# Altium PCB C500_PHY_IP101GRI_V1.0.0.PcbDoc
Units mil, origin at the board's own origin, x right, y up, seen from the top; angles counter-clockwise.
Board outline 6000 x 4000 mil, 2 copper layers (Top, Bottom), stack 12.7 mil thick; 82 components, 71 nets, 264 pads, 232 vias.
Unrouted connection lines stored in the file: 154.
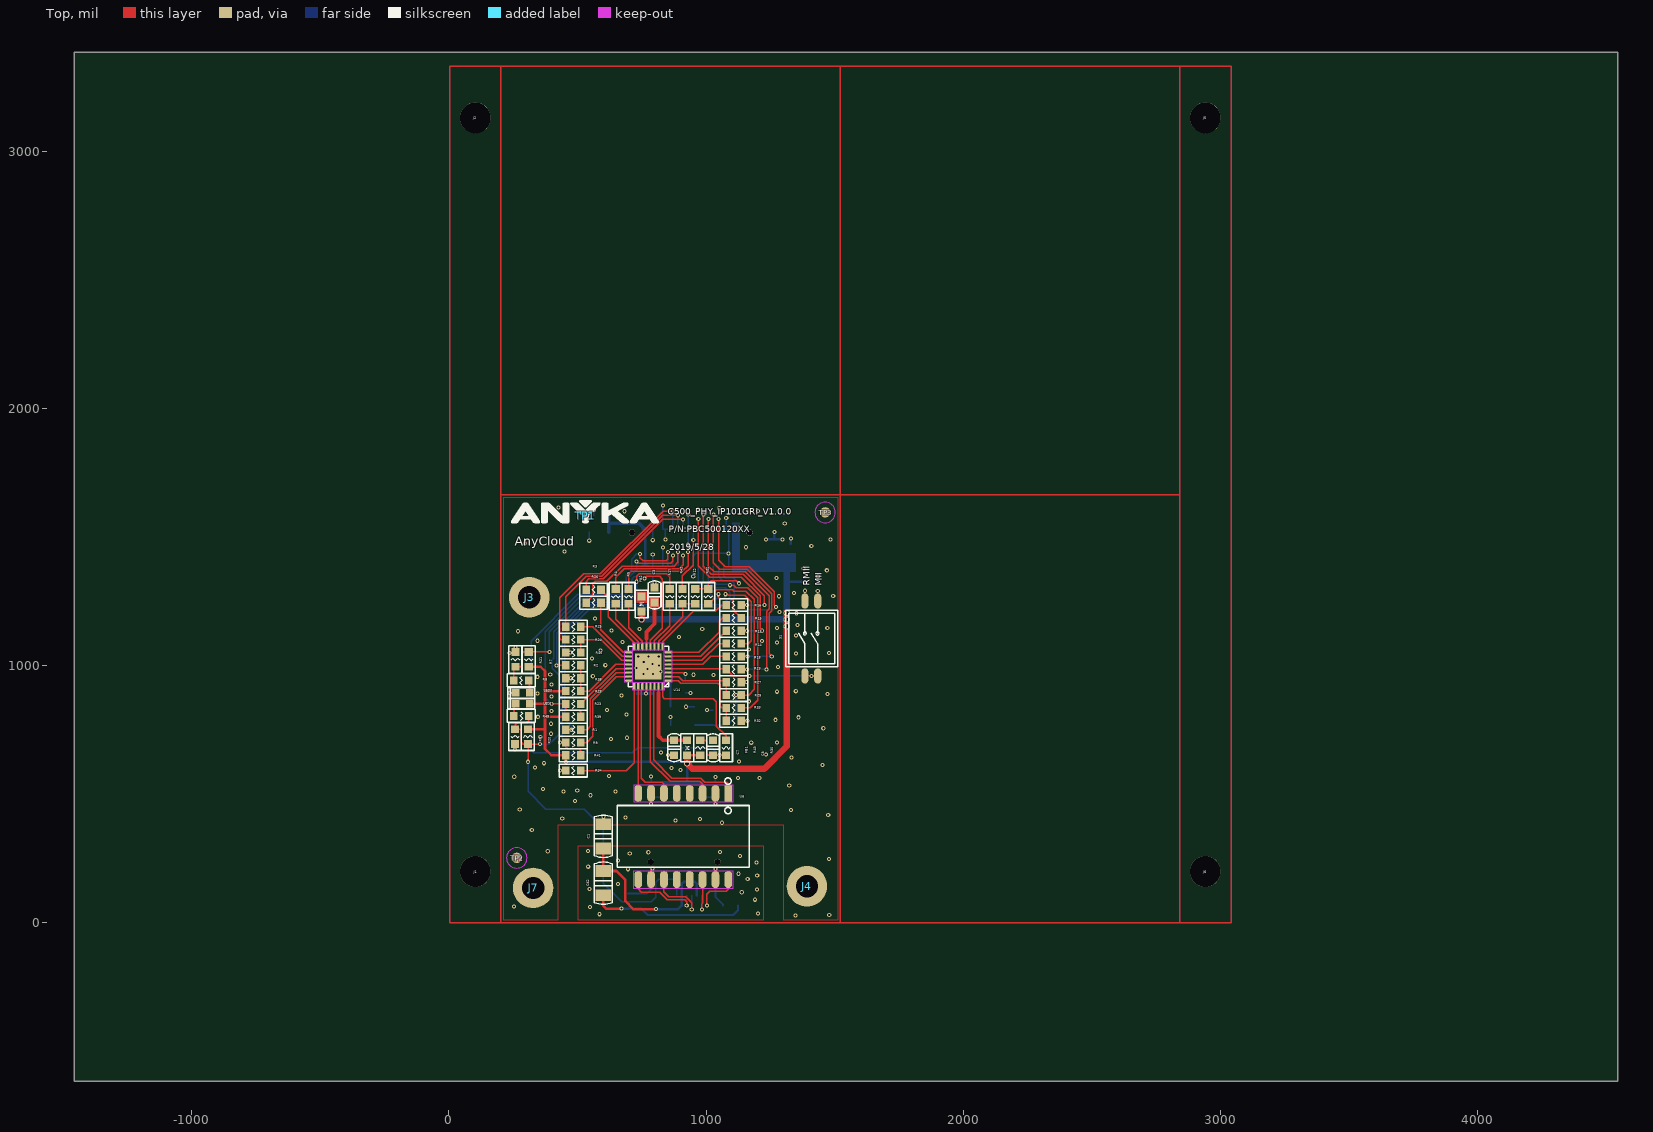
[diagram p0: Top view]
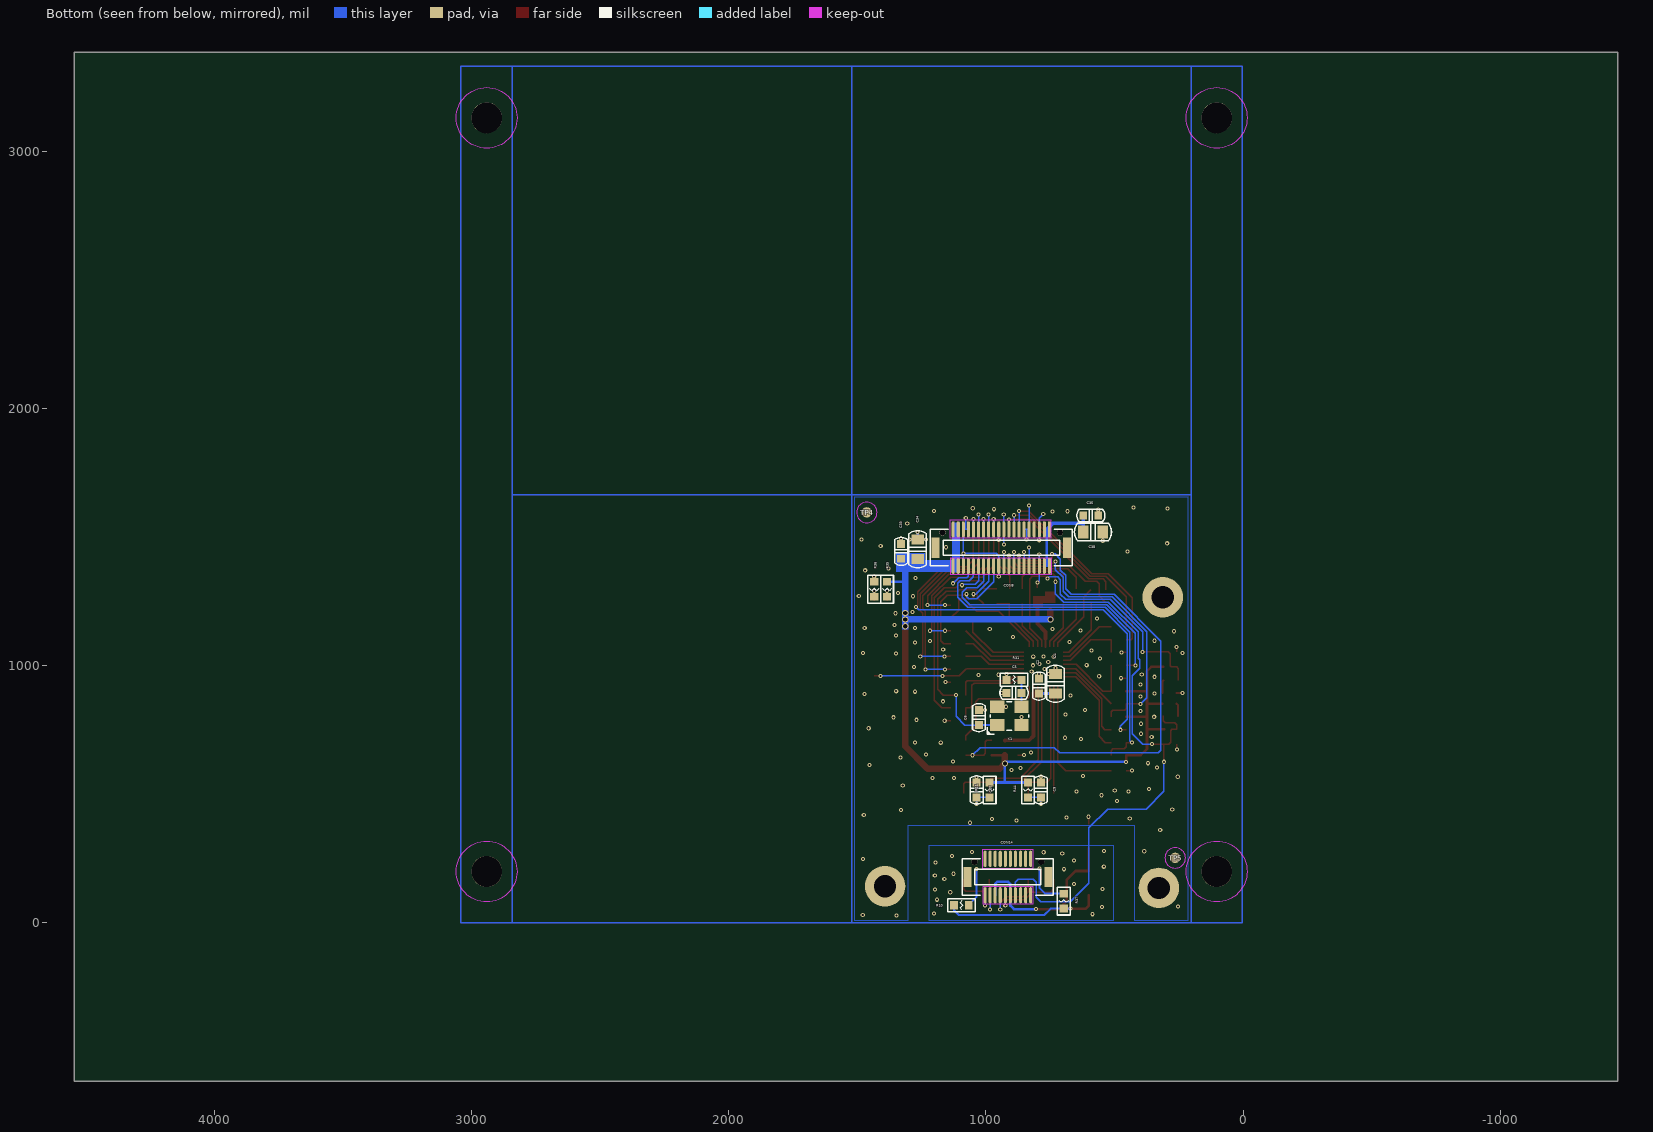
[diagram p1: Bottom view, seen from below]

## Layer stack, top to bottom
Solder Mask Top: solder mask 0.4, Solder Resist, Dk 3.5
Top: signal copper 1.35
Dielectric 1: dielectric 10, FR-4, Dk 4.3
Bottom: signal copper 1.35
Solder Mask Bottom: solder mask 0.4, Solder Resist, Dk 3.5

## Board outline
-1456,-615.5 4544,-615.5 4544,3384.5 -1456,3384.5

## Design rules (kind name [scope] priority, off if disabled: settings)
Clearance "Clearance - Default - DEFAULT- SMD" [IsVia vs IsSMTPin] p1: gap=0 ignorepadtopadclearanceinfootprint=FALSE
Clearance "Clearance - Default - DEFAULT - Via" [IsVia vs IsVia] p2: gap=0 ignorepadtopadclearanceinfootprint=FALSE
Clearance "Clearance - Default - DEFAULT - Net" [All] p3: gap=5 ignorepadtopadclearanceinfootprint=FALSE except(0: Arc-Hole Track-Hole SMDPad-Hole THPad-Hole Via-Hole Fill-Hole Poly-Hole Region-Hole Text-Hole; 6: Fill-Fill Fill-Poly Fill-Region Poly-Poly Poly-Region Region-Region; 8: SMDPad-Fill SMDPad-Poly SMDPad-Region THPad-Fill THPad-Poly THPad-Region; 10: Arc-Text Track-Text SMDPad-Text THPad-Text Via-Text Fill-Text Poly-Text Region-Text Text-Text)
ComponentClearance "ComponentClearance - Default - DEFAULT" [All] p1: gap=0 collisioncheckmode=3 verticalgap=10 showdistances=FALSE
FanoutControl Fanout_Small [(CompPinCount < 5)] p3: bgadir=Out bgaviamode=Centered fanoutstyle=Auto fanoutdirection=OutThenIn viagrid=1 // Fanout_Small (Default Rule)
FanoutControl Fanout_SOIC [IsSOIC] p4: bgadir=Out bgaviamode=Centered fanoutstyle=Auto fanoutdirection=Alternating viagrid=1 // Fanout_SOIC (Default Rule)
HoleToHoleClearance "HoleToHoleClearance - Default - DEFAULT" [All] p1: gap=0 allowstackedmicrovias=TRUE
Length "Default Length" [All] p1: maxlimit=50000 minlimit=0
MaxMinImpedance "Default Impedance" [All] p1: minimum=50.00 maximum=150.0
ParallelSegment "Default Parallel Segment Adjasent" [All] p1: limit=1000 gap=200
ParallelSegment "Default Parallel Segment Same Layer" [All] p2: limit=1000 gap=200
PlaneConnect "Default PlaneConnect" [All] p1: planeconnectstyle=Direct reliefexpansion=20 reliefentries=4 reliefconductorwidth=8 reliefairgap=10
PolygonConnect "PolygonConnect - Default SMT" [IsSMTPin] p1: connectstyle=Direct reliefconductorwidth=8 reliefentries=4 polygonreliefangle="45 Angle" airgapwidth=10
PolygonConnect "PolygonConnect - Default Pad" [All] p2: connectstyle=Direct reliefconductorwidth=8 reliefentries=4 polygonreliefangle="45 Angle" airgapwidth=10
RoutingLayers "RoutingLayers - Default - DEFAULT" [All] p1: top layer_v5=TRUE bottom layer_v5=TRUE
RoutingPriority "RoutingPriority - Default - DEFAULT" [All] p1: routingpriority=3
RoutingTopology "Default Routing Topology" [All] p1: topology=Shortest
RoutingVias "RoutingVias - Default - DEFAULT" [All] p1: holewidth=8 width=16 viastyle="Through Hole" minholewidth=8 minwidth=16 maxholewidth=8 maxwidth=16
SMDToCorner "SMDToCorner - Default - DEFAULT" [All] p1: distance=0
SolderMaskExpansion [All] p1: expansion=4 istentingtop=FALSE
Width "Default Width" [All] p1: maxlimit=50 minlimit=5 preferedwidth=5
20 further rules are at their usual default settings.

## Components (designator, comment, footprint, x,y, rotation, side; value= is the part's Value field where it differs from the comment)
C1 "C1206" C1206 600.8,336.78 r0 top
C2 "C0603" C0603 793.8,920.78 r270 bottom
C3 "C0603" C0603 799.8,1274.78 r90 top
C4 "C0805" C0805 729.8,929.78 r90 bottom
C5 "C0603" C0603 890.8,894.28 r180 bottom
C6 "C0603" C0603 1027.3,798.28 r270 bottom
C7 "C0603" C0603 875.8,681.28 r270 top
C8 "C0603" C0603 1027.3,680.78 r270 top
C9 "C0603" C0603 786.3,516.78 r90 bottom
C10 "C0603" C0603 1036.3,516.78 r90 bottom
C33 "C0603" C0603 1329.8,1444.28 r270 bottom
C34 "C0805" C0805 1265.3,1452.78 r270 bottom
C35 "C0603" C0603 592.3,1583.78 r0 bottom
C38 "C0805" C0805 583.8,1519.78 r0 bottom
C62 "C1206" C1206 600.8,154.28 r0 top
CON8 "CON20X2_0MM5_BTB_DF12" CON20X2_0MM5_BTB_DF12 940.3,1458.78 r180 bottom
CON14 "CON10X2_0MM5_BTB_DF12" CON10X2_0MM5_BTB_DF12 914.8,178.28 r180 bottom
FB1 "FB0603" FB0603 926.3,680.78 r90 top
FB2 "FB0603" FB0603 749.3,1239.78 r270 top
J1 "SCREWING_H_3MM" SCREWING_H_3MM 102.8,199.78 r0 top
J2 "SCREWING_H_3MM" SCREWING_H_3MM 102.8,3129.78 r0 top
J3 "H_2MM2_4MM" H_2MM2_4MM 312.8,1265.78 r0 top
J4 "H_2MM2_4MM" H_2MM2_4MM 1392.3,142.78 r0 top
J5 "SCREWING_H_3MM" SCREWING_H_3MM 2940.8,3129.78 r0 top
J6 "SCREWING_H_3MM" SCREWING_H_3MM 2940.8,199.78 r0 top
J7 "H_2MM2_4MM" H_2MM2_4MM 327.8,135.78 r0 top
LED1 "LED0603" LED0603 286.8,852.28 r0 top
LED2 "LED0603" LED0603 286.8,894.28 r0 top
R1 "R0603" R0603 483.8,751.28 r180 top
R2 "R0603" R0603 483.8,1001.28 r180 top
R3 "R0603" R0603 562.8,1294.78 r180 top
R4 "R0603" R0603 648.8,1269.28 r90 top
R5 "R0603" R0603 698.8,1269.28 r90 top
R6 "R0603" R0603 257.3,724.28 r90 top
R7 "R0603" R0603 310.3,1024.28 r90 top
R8 "R0603" R0603 281.3,942.78 r0 top
R9 "R0603" R0603 483.8,701.28 r180 top
R10 "R0603" R0603 1095.3,68.28 r180 bottom
R11 "R0603" R0603 985.8,516.78 r90 bottom
R12 "R0603" R0603 958.3,1269.28 r90 top
R13 "R0603" R0603 1107.3,1135.78 r0 top
R14 "R0603" R0603 1107.3,1085.78 r0 top
R15 "R0603" R0603 1107.3,1185.78 r0 top
R16 "R0603" R0603 1107.3,1235.78 r0 top
R17 "R0603" R0603 858.8,1269.28 r90 top
R18 "R0603" R0603 1107.3,1035.78 r0 top
R19 "R0603" R0603 1107.3,985.78 r0 top
R20 "R0603" R0603 307.3,724.28 r270 top
R21 "R0603" R0603 258.8,1024.28 r270 top
R22 "R0603" R0603 1008.3,1269.28 r90 top
R23 "R0603" R0603 483.8,851.28 r180 top
R24 "R0603" R0603 483.8,1101.28 r180 top
R25 "R0603" R0603 483.8,1151.28 r180 top
R26 "R0603" R0603 562.8,1244.78 r180 top
R27 "R0603" R0603 1107.3,935.78 r180 top
R28 "R0603" R0603 483.8,901.28 r180 top
R29 "R0603" R0603 1107.3,885.78 r180 top
R30 "R0603" R0603 1077.8,680.78 r90 top
R31 "R0603" R0603 890.8,944.78 r0 bottom
R32 "R0603" R0603 1107.3,785.78 r180 top
R33 "R0603" R0603 1107.3,835.78 r180 top
R34 "R0603" R0603 483.8,592.28 r0 top
R35 "R0603" R0603 1384.3,1296.78 r90 bottom
R36 "R0603" R0603 1434.3,1296.78 r90 bottom
R37 "R0603" R0603 697.3,84.78 r90 bottom
R38 "R0603" R0603 483.8,951.28 r180 top
R39 "R0603" R0603 483.8,801.28 r180 top
R40 "R0603" R0603 483.8,1051.28 r180 top
R41 "R0603" R0603 483.8,651.78 r180 top
R42 "R0603" R0603 908.3,1269.28 r90 top
R43 "R0603" R0603 977.3,680.78 r270 top
R44 "R0603" R0603 836.3,516.78 r90 bottom
R49 "R0603" R0603 281.8,804.78 r180 top
S1 "SWITCH_DHM-04_1MM27_5MM6X4MM5" SWITCH_DHM-04_1MM27_5MM6X4MM5 1410.8,1105.78 r90 top
TP1 "LOGO_ANYKA" LOGO_ANYKA 531.3,1583.28 r0 top
TP2 "FIDU_40" FIDU_40 264.16,252.98 r0 top
TP3 "FIDU_40" FIDU_40 1463.16,1595.98 r0 top
TP4 "FIDU_40" FIDU_40 1463.16,1595.97 r180 bottom
TP5 "FIDU_40" FIDU_40 264.16,252.97 r180 bottom
U6 "TRC1188NL_S" TRC1188NL_S 911.3,336.28 r270 top
U14 "IP101GR$2F$GRI_QFN32_0MM4_4X4MM" IP101GR$2F$GRI_QFN32_0MM4_4X4MM 775.8,996.78 r180 top
X1 "KSX23" KSX23 908.8,804.78 r180 bottom

## Footprints (in the part's own frame and the unit in brackets; to place one, negate y for a bottom-side part, rotate by r counter-clockwise, add the part's x,y. Pads: shape width x height; smd on the part's side, far side on the other; paste and mask are expansions set on the pad)
C0603 [mil]
  rect 30x32 smd: 1(-29,0) 2(29,0)
  silkscreen extent -55,-25 55,25
C0805 [mil]
  rect 40x50 smd: 1(-38,0) 2(38,0)
  silkscreen extent -72,-34 72,34
C1206 [mil]
  rect 60x45 smd: 1(0,47.5) 2(0,-47.5)
  silkscreen extent -35,-83 35,83
CON10X2_0MM5_BTB_DF12 [mm]
  oval 0.3x1.6 smd: 1(-2.25,-1.8) 2(-2.25,1.8) 3(-1.75,-1.8) 4(-1.75,1.8) 5(-1.25,-1.8) 6(-1.25,1.8) 7(-0.75,-1.8) 8(-0.75,1.8) 9(-0.25,-1.8) 10(-0.25,1.8) 11(0.25,-1.8) 12(0.25,1.8) 13(0.75,-1.8) 14(0.75,1.8) 15(1.25,-1.8) 16(1.25,1.8) 17(1.75,-1.8) 18(1.75,1.8) 19(2.25,-1.8) 20(2.25,1.8)
  rect 0.8x2 smd: 41(-4,0) 42(4,0)
  round 0.6 hole 0.6 unplated: 43(-3.3,1.5) 44(3.3,1.5)
  silkscreen extent -4.5,-1.8 4.5,1.8
CON20X2_0MM5_BTB_DF12 [mm]
  oval 0.3x1.6 smd: 1(-4.75,-1.8) 2(-4.75,1.8) 3(-4.25,-1.8) 4(-4.25,1.8) 5(-3.75,-1.8) 6(-3.75,1.8) 7(-3.25,-1.8) 8(-3.25,1.8) 9(-2.75,-1.8) 10(-2.75,1.8) 11(-2.25,-1.8) 12(-2.25,1.8) 13(-1.75,-1.8) 14(-1.75,1.8) 15(-1.25,-1.8) 16(-1.25,1.8) 17(-0.75,-1.8) 18(-0.75,1.8) 19(-0.25,-1.8) 20(-0.25,1.8) 21(0.25,-1.8) 22(0.25,1.8) 23(0.75,-1.8) 24(0.75,1.8) 25(1.25,-1.8) 26(1.25,1.8) 27(1.75,-1.8) 28(1.75,1.8) 29(2.25,-1.8) 30(2.25,1.8) 31(2.75,-1.8) 32(2.75,1.8) 33(3.25,-1.8) 34(3.25,1.8) 35(3.75,-1.8) 36(3.75,1.8) 37(4.25,-1.8) 38(4.25,1.8) 39(4.75,-1.8) 40(4.75,1.8)
  rect 0.8x2 smd: 41(-6.5,0) 42(6.5,0)
  round 0.6 hole 0.6 unplated: 43(-5.8,1.5) 44(5.8,1.5)
  silkscreen extent -7,-1.8 7,1.8
FB0603 [mil]
  rect 30x32 smd: 1(-29,0) 2(29,0)
  silkscreen extent -54,-25 54,25
FIDU_40 [mil]
  round 40 smd: 1(0,0)
  Top keep-out region: 40,0 36.96,15.31 28.28,28.28 15.31,36.96 0,40 0,40 -15.31,36.96 -28.28,28.28 -36.96,15.31 -40,0 -40,0 -36.96,-15.31 -28.28,-28.28 -15.31,-36.96 0,-40 0,-40 15.31,-36.96 28.28,-28.28 36.96,-15.31 40,0
H_2MM2_4MM [mil]
  round 157.5 hole 86.6: 1(0,0)
IP101GR$2F$GRI_QFN32_0MM4_4X4MM [mm]
  oval 0.7x0.22 smd: 1(-1.95,1.4) 2(-1.95,1) 3(-1.95,0.6) 4(-1.95,0.2) 5(-1.95,-0.2) 6(-1.95,-0.6) 7(-1.95,-1) 8(-1.95,-1.4) 17(1.95,-1.4) 18(1.95,-1) 19(1.95,-0.6) 20(1.95,-0.2) 21(1.95,0.2) 22(1.95,0.6) 23(1.95,1) 24(1.95,1.4)
  oval 0.22x0.7 smd: 9(-1.4,-1.95) 10(-1,-1.95) 11(-0.6,-1.95) 12(-0.2,-1.95) 13(0.2,-1.95) 14(0.6,-1.95) 15(1,-1.95) 16(1.4,-1.95) 25(1.4,1.95) 26(1,1.95) 27(0.6,1.95) 28(0.2,1.95) 29(-0.2,1.95) 30(-0.6,1.95) 31(-1,1.95) 32(-1.4,1.95)
  rect 2.6x2.6 smd: 33(0,0)
  silkscreen extent -2,-2 2,2
KSX23 [mil]
  rect 55.1x47.2 smd: 1(-47.24,-35.43) 2(47.24,-35.43) 3(47.24,35.43) 4(-47.24,35.43)
  silkscreen extent -87,-71 75,55
LED0603 [mil]
  rect 30x30 smd: A(27.5,0) K(-27.5,0)
  silkscreen extent -57,-20 48,20
LOGO_ANYKA [mil]
  silkscreen extent -289,-28 284,59
R0603 [mil]
  rect 30x32 smd: 1(-29,0) 2(29,0)
  silkscreen extent -54,-25 54,25
SCREWING_H_3MM [mil]
  round 120 hole 120 unplated: 1(0,0)
  Bottom keep-out region: 118.11,0 109.12,45.2 83.52,83.52 45.2,109.12 0,118.11 0,118.11 -45.2,109.12 -83.52,83.52 -109.12,45.2 -118.11,0 -118.11,0 -109.12,-45.2 -83.52,-83.52 -45.2,-109.12 0,-118.11 0,-118.11 45.2,-109.12 83.52,-83.52 109.12,-45.2 118.11,0
SWITCH_DHM-04_1MM27_5MM6X4MM5 [mm]
  oval 1.5x0.7 smd: 1(-3.7,0.675) 2(3.7,0.675) 3(-3.7,-0.595) 4(3.7,-0.595)
  silkscreen extent -2.8,-2.55 2.8,2.55
TRC1188NL_S [mm]
  rect 1.7x0.76 smd: 1(-4.25,4.445)
  oval 1.7x0.76 smd: 2(-4.25,3.175) 3(-4.25,1.905) 4(-4.25,0.635) 5(-4.25,-0.635) 6(-4.25,-1.905) 7(-4.25,-3.175) 8(-4.25,-4.445) 9(4.25,-4.445) 10(4.25,-3.175) 11(4.25,-1.905) 12(4.25,-0.635) 13(4.25,0.635) 14(4.25,1.905) 15(4.25,3.175) 16(4.25,4.445)
  silkscreen extent -5.78,-6.5 3.05,6.5

## Via types
v1: diameter 16, hole 8, Top to Bottom, 227 vias
v2: diameter 24, hole 16, Top to Bottom, 5 vias

## Nets (pads, with @x,y where several pads share a name; then routed paths per layer and width w, separated by ;. In a path a pad name is that pad's centre, name@x,y a point inside that pad or via, vN(x,y) a via of type N, cw(c..) or ccw(c..) an arc to the next point about the centre after c; other vN are vias at no path point)
3V3: C33.2 C34.2 CON8.1 CON8.2 CON8.3 CON8.4 FB1.1 FB2.2 LED1.A R7.1 R11.2 R20.1 R28.2 R35.2 R39.2 R41.2 R43.2 R44.2 | length 3637.3
  Top w10: R20.1 373.8,753.28 ; R7.1 357.3,995.28 373.8,978.78 373.8,901.28 ; LED1.A 373.8,852.28 ; v1(454.8,625.78) R41.2 398.8,651.78 373.8,676.78 373.8,753.28 ; R39.2 373.8,801.28 ; R28.2 373.8,901.28 ; FB1.1 R43.2 ; 373.8,753.28 373.8,801.28 ; 373.8,801.28 373.8,852.28 ; 373.8,852.28 373.8,901.28
  Top w25: v2(749.3,1179.78) FB2.2 ; FB1.1 v2(926.3,619.78) 946.3,599.78 1226.8,599.78 1313.8,686.78 v2(1313.8,1153.28) v2(1313.8,1179.78)
  Bottom w8: CON8.3 CON8.1 1127.44,1387.78 1238.3,1387.78 C34.2 1313.8,1414.78 1329.3,1414.78 C33.2 ; CON8.4 CON8.2
  Bottom w10: v1(454.8,625.78) 920.3,625.78 v2(926.3,619.78) 926.3,545.78 ; R44.2 926.3,545.78 ; R11.2 926.3,545.78 ; 1313.8,1325.78 R35.2
  Bottom w25: v2(749.3,1179.78) v2(1313.8,1179.78) v2(1313.8,1205.28) 1313.8,1325.78 C33.2@1313.8,1414.78
$$$2269: LED1.K R49.2 | length 50.2
  Top w8: R49.2 252.8,845.78 LED1.K
$$$3457: R10.2 U6.15 | length 194.7
  Top w8: U6.15 v1(1036.3,209.78)
  Bottom w8: v1(1036.3,209.78) 1036.3,100.92 1066.3,70.92 R10.2
$$$3530: C62.2 R10.1 R37.1 | length 605.7
  Top w10: C62.2 600.8,66.28 611.3,55.78 v1(670.8,55.78)
  Bottom w8: R37.1 748.8,55.78 773.8,30.78 1106.3,30.78 1124.3,48.78 R10.1
  Bottom w10: v1(670.8,55.78) R37.1
$$$5651: R13.1 U14.7 | length 267
  Top w5: U14.7 978.67,1036.15 R13.1
$$$5668: R14.1 U14.6 | length 252.8
  Top w5: U14.6 983.92,1020.41 1049.3,1085.78 R14.1
$$$5919: R15.1 U14.8 | length 305.7
  Top w5: U14.8 972.3,1051.9 1050.3,1129.9 1050.3,1171.78 1064.3,1185.78 R15.1
$$$5952: R16.1 U14.9 | length 325.8
  Top w5: U14.9 830.92,1092.78 950.42,1212.28 1036.53,1212.28 1060.03,1235.78 R16.1
$$$6084: R17.1 U14.11 | length 191.3
  Top w5: U14.11 799.42,1096.41 858.8,1155.78 R17.1
$$$6602: R18.1 U14.5 | length 238.7
  Top w5: U14.5 946.05,1004.66 946.11,1004.6 987.61,1004.6 1018.8,1035.78 R18.1
$$$7835: R23.1 U14.21 | length 243.2
  Top w5: R23.1 650.43,988.91 U14.21
$$$7896: R25.1 U14.18 | length 233.9
  Top w5: R25.1 559.67,1151.28 674.8,1036.15 U14.18
$$$7971: R26.1 U14.17 | length 249.9
  Top w5: R26.1 591.3,1244.28 591.3,1138.78 678.18,1051.9 U14.17
$$$8344: C9.1 R44.1 U6.7 | length 117.8
  Top w5: v1(786.3,461.78) U6.7
  Bottom w5: v1(786.3,461.78) C9.1 R44.1
$$$8391: R31.2 U14.3 | length 92.4
  Top w6: U14.3 914.3,973.16 v1(919.68,967.78)
  Bottom w6: v1(919.68,967.78) 919.8,967.66 R31.2
$$$8409: R36.1 S1.4 | length 62.4
  Top w5: S1.4 v1(1434.23,1290.78)
  Bottom w5: v1(1434.23,1290.78) 1434.23,1267.86 R36.1
$$$8411: R35.1 S1.2 | length 63.4
  Top w5: S1.2 v1(1384.23,1291.28)
  Bottom w5: v1(1384.23,1291.28) 1384.23,1267.86 R35.1
$$$8505: R32.2 R33.2 U14.1 | length 367.6
  Top w5: U14.1 891.92,941.67 901.3,932.28 1046.3,932.28 1055.3,923.28 1055.3,841.28 1060.8,835.78 R33.2 R32.2
$$$10551: LED2.A R8.2 | length 50.2
  Top w8: R8.2 314.3,938.78 LED2.A
$$$11261: R27.2 R29.2 U14.2 | length 284.7
  Top w5: U14.2 894.3,957.41 909.43,942.28 1071.8,942.28 R27.2 R29.2
$$$11628: R12.1 R42.1 U14.10 | length 255.7
  Top w5: U14.10 815.17,1095.65 908.8,1189.28 908.8,1239.78 R42.1 R12.1
$$$14388: C7.1 FB1.2 U14.31 | length 311.3
  Top w8: 815.17,893.78 U14.31
  Top w15: 815.17,893.78 815.17,726.91 831.8,710.28 C7.1 925.8,710.28 FB1.2
$$$15509: R34.2 U14.25 | length 517.6
  Top w5: R34.2 689.92,592.28 720.68,623.05 U14.25
$$$15574: C2.2 C4.1 U14.28 | length 93.1
  Top w8: v1(765.8,891.78) 767.93,893.78 U14.28
  Bottom w10: C4.1 v1(765.8,891.78) C2.2
$$$19424: R30.2 U14.32 | length 423.8
  Top w5: U14.32 830.92,879.67 838.3,872.28 1028.3,872.28 1040.3,860.28 1040.3,764.28 1077.8,726.78 R30.2
$$$21778: C10.1 R11.1 U6.2 | length 118.3
  Top w5: v1(1036.3,461.78) U6.2
  Bottom w5: R11.1 C10.1 v1(1036.3,461.78)
$$$22214: C3.1 FB2.1 U14.13 | length 185.4
  Top w8: U14.13 767.93,1105.78
  Top w15: 767.93,1105.78 767.93,1130.91 799.8,1162.78 C3.1
$$$23676: R9.1 U14.23 | length 375.2
  Top w5: R9.1 536.8,701.28 560.3,724.78 560.3,866.28 651.3,957.28 698.9,957.28 U14.23
$$$23740: R1.1 U14.22 | length 341.9
  Top w5: R1.1 512.92,751.16 537.8,751.16 550.3,763.66 550.3,872.28 651.18,973.16 U14.22
$$$28550: R37.2 U6.10 | length 222.3
  Top w8: U6.10 786.3,205.78 v1(791.3,210.78)
  Bottom w8: R37.2 769.8,113.78 791.3,135.28 v1(791.3,210.78)
$$$29983: R3.1 U14.16 | length 274.6
  Top w5: R3.1 620.3,1266.28 620.3,1189.28 720.68,1088.9 U14.16
$$$31440: R4.1 U14.15 | length 203
  Top w5: R4.1 648.8,1180.28 736.43,1092.65 U14.15
$$$31794: R5.1 U14.14 | length 188.8
  Top w5: R5.1 698.8,1148.28 752.18,1094.91 U14.14
FX_HEN: R24.1 R40.1 U14.19 | length 269.7
  Top w5: R40.1 R24.1 591.8,1101.28 672.68,1020.41 U14.19
GND: C1.1 C2.1 C3.2 C4.2 C5.1 C6.1 C7.2 C8.1 C9.2 C10.2 C33.1 C34.1 C35.1 C38.1 CON8.5 CON8.6 CON8.8 CON8.19 CON8.22 CON8.30 CON8.31 CON8.32 CON8.35 CON8.36 J3.1 J4.1 J7.1 LED2.K R6.1 R21.1 R27.1 R32.1 R34.1 R36.2 R38.2 R40.2 U14.33 X1.2 X1.4 | length 1647.5
  Top w5: v1(257.3,674.28) R6.1 ; R21.1 v1(258.8,1072.78) ; v1(431.8,592.28) R34.1 ; R38.2 v1(475.3,951.28) ; R40.2 v1(473.3,1051.28) ; C1.1 v1(600.8,412.78) ; C3.2 v1(799.8,1322.78) ; v1(852.3,652.28) C7.2 ; R32.1 v1(1160.3,785.78) ; R27.1 v1(1157.8,935.78)
  Top w8: v1(235.8,894.28) LED2.K
  Bottom w5: v1(545.8,1485.78) C38.1 ; C35.1 v1(563.3,1606.28) ; v1(729.8,990.28) C4.2 v1(756.3,967.78) ; v1(777.3,1589.15) 792.66,1573.78 CON8.36 v1(792.66,1487.78) ; C9.2 v1(786.3,569.78) ; v1(792.66,1432.78) CON8.35 792.66,1329.28 793.3,1329.28 v1(799.8,1322.78) ; C2.1 v1(793.8,968.28) ; CON8.31 v1(832.03,1459.28) ; v1(832.03,1623.28) CON8.32 842.3,1529.65 ; v1(842.3,1489.78) 842.3,1529.65 ; CON8.30 842.3,1529.65 ; X1.2 861.8,769.35 v1(861.8,799.78) ; C5.1 v1(939.8,894.28) ; v1(922.3,840.21) X1.4 ; v1(930.3,1470.78) 930.3,1529.65 CON8.22 930.8,1529.65 v1(930.8,1588.28) ; v1(950.14,1346.78) CON8.19 950.14,1426.28 960.14,1436.28 v1(1087.94,1436.28) ; v1(1003.8,827.28) C6.1 ; C10.2 v1(1036.3,567.28) ; CON8.8 1078.3,1529.65 ; v1(1078.3,1574.28) 1078.3,1529.65 ; CON8.5 v1(1087.94,1436.28) ; R36.2 v1(1434.3,1347.28) ; 1078.3,1529.65 CON8.6 v1(1087.94,1436.28)
  Bottom w10: v1(1232.3,1490.78) C34.1 ; v1(1265.3,1519.28) C34.1 ; v1(1297.8,1490.78) C34.1 ; C33.1 v1(1329.8,1494.28)
  other v1: 1348.19,28.54 1478.98,31.29 253.68,63.75 1477.6,248.82 384.48,278.53 322.52,361.14 1061.3,389.28 881.4,398.71 976.83,403.87 440.92,406.57 686.67,409.03 1474.85,419.54 1330.29,438.81 275.8,440.28 489.8,473.78 550.8,496.28 445.5,511.32 647.97,511.32 499.3,514.28 365.8,520.28 1323.3,533.78 1123.8,562.78 1208.3,563.28 254.3,568.28 622.3,570.78 900.8,593.78 866.3,601.78 335.3,604.28 1452.8,614.28 369.8,620.78 1127.8,626.78 1332.75,643.55 1232.8,655.28 825.3,662.28 1175.56,700.5 1275.3,700.78 630.3,715.28 692.3,719.78 355.51,722.24 397.3,735.28 1455.75,756.81 396.8,774.28 1270.27,789.6 1359.3,799.28 345.8,801.28 690.3,809.78 398.8,823.28 615.11,827.24 1166.79,861.47 398.8,880.78 671.38,884.01 1472.23,890.04 345.3,892.28 1276.3,898.78 1348.8,900.78 399.3,926.78 344.8,956.78 559.71,958.96 1028.3,963.78 951.3,964.78 394.3,965.78 822.07,977.05 772.57,986.33 1279.3,995.28 608.3,1001.78 817.31,1001.47 791.1,1006.23 757.74,1014.57 556.26,1027.93 736.29,1034.83 816.11,1034.83 775.61,1036.02 1349.8,1047.78 235.3,1048.78 1477.72,1049.36 589.3,1059.28 1166.05,1063.55 1275.3,1089.78 675.3,1091.78 1217.3,1095.28 344.8,1096.78 894.91,1111.71 1349.63,1117.33 268.3,1133.78 632.3,1137.28 741.8,1142.78 985.19,1142.66 1275.8,1146.28 1471.23,1146.04 1355.81,1158.37 568.86,1183.55 1351.3,1203.78 1286,1208.41 1283.3,1269.78 1494.3,1270.28 1341.8,1282.28 1274.3,1340.28 1469.3,1370.78 1378.8,1377.28 450.18,1444.54 1155.8,1460.28 1409.05,1465.52 295.3,1475.78 1484.3,1490.28 1305.9,1552.03 741.3,1599.28 682.8,1600.28 1202.05,1601.75 968.3,1608.28 293.8,1611.28 1051.16,1612.06 425.73,1615.11
GND_EARTH: C1.2 C62.1 CON14.5 CON14.11 | length 701.2
  Top w10: C1.2 C62.1 651.3,201.78 686.3,166.78 686.3,84.28 716.8,53.78 v1(805.3,53.78)
  Bottom w10: v1(805.3,53.78) 891.46,53.78 904.96,67.28 CON14.11 904.96,150.78 913.96,159.78 956.3,159.78 964.3,151.78 964.3,107.7 CON14.5
  other v1: 585.8,33.78 1202.49,36.76 548.3,61.78 1189.76,90.14 1138.8,119.28 1197.76,129.61 546.47,132.37 657.1,150.95 1161.91,171.34 1198.8,184.28 1125.85,191 696.3,208.78 541.84,218.44 1196.3,235.28 657.7,242.83 1131.77,260.2 703.36,269.72 775.44,274.68 1054.82,276.06 540.91,279.53
LEDMOD: R2.1 R28.1 R38.1 U14.20 | length 329
  Top w5: R2.1 R38.1 R28.1 545.3,901.28 648.67,1004.66 U14.20
MAC_50MCLK: CON8.7 R12.2 R22.2 | length 308.7
  Top w5: R12.2 R22.2 1008.3,1318.28 1020.3,1330.28 1117.3,1330.28 v1(1127.3,1320.28)
  Bottom w5: CON8.7 1068.25,1348.28 1074.25,1342.28 1105.8,1342.28 1127.3,1320.78 v1(1127.3,1320.28)
MAC_COL: CON8.14 R19.2 | length 896
  Top w5: v1(1009.2,1569.78) 1009.2,1386.89 1031.3,1364.78 1152.3,1364.78 1245.3,1271.78 1245.3,1220.78 1235.3,1210.78 v1(1235.3,985.78) ; R19.2 v1(1158.8,985.78)
  Bottom w5: CON8.14 v1(1009.2,1569.78) ; v1(1158.8,985.78) v1(1235.3,985.78)
MAC_CRS: CON8.13 R2.2 | length 1072.7
  Top w5: v1(418.8,1001.28) R2.2
  Bottom w5: v1(418.8,1001.28) 418.8,1125.78 530.3,1237.28 1063.3,1237.28 1092.8,1266.78 1092.8,1285.78 1074.8,1303.78 1033.7,1303.78 1009.2,1328.28 CON8.13
MAC_LED0: CON14.13 R6.2 R17.2 R20.2 R49.1 | length 2573.4
  Top w5: v1(307.8,626.28) 307.8,694.78 R20.2 ; R49.1 310.8,785.78 303.8,778.78 265.8,778.78 257.3,770.28 R6.2 276.8,753.28 282.3,747.78 282.3,701.78 288.8,695.28 R20.2 ; v1(353.8,695.28) R20.2 ; v1(730.3,1326.28) 730.3,1347.28 740.3,1357.28 846.8,1357.28 858.8,1345.28 R17.2
  Bottom w5: v1(307.8,626.28) 307.8,511.28 376.8,442.28 527.3,442.28 600.3,369.28 600.3,153.78 671.8,82.28 787.8,82.28 805.3,99.78 805.3,157.28 816.8,168.78 874.3,168.78 885.27,157.81 CON14.13 ; v1(353.8,695.28) 390.8,695.28 430.3,734.78 430.3,961.28 401.3,990.28 401.3,1022.78 407.8,1029.28 407.8,1131.1 524.5,1247.28 697.8,1247.28 730.3,1279.78 v1(730.3,1326.28)
MAC_LED3: R7.2 R8.1 R21.2 U14.12 | length 1169.8
  Top w5: R8.1 252.3,988.78 R21.2 279.3,995.28 284.3,1000.28 284.3,1046.78 290.8,1053.28 R7.2 v1(391.3,1053.28) ; v1(760.3,1338.28) 768.8,1346.78 819.8,1346.78 830.3,1336.28 830.3,1144.78 783.67,1098.16 U14.12
  Bottom w5: v1(391.3,1053.28) 391.3,1131.28 517.3,1257.28 689.3,1257.28 710.3,1278.28 710.3,1334.28 720.8,1344.78 753.8,1344.78 v1(760.3,1338.28)
MAC_MDCLK: CON8.10 R1.2 | length 1802.6
  Top w5: R1.2 454.8,750.78 v1(477.3,750.78) ; v1(1048.57,1569.78) 1048.57,1410.28 1074.07,1384.78 1168.8,1384.78 1265.3,1288.28 1265.3,1235.78 v1(1272.3,1228.78)
  Bottom w5: v1(477.3,750.78) 477.3,764.78 450.3,791.78 450.3,1124.99 543,1217.28 1260.8,1217.28 v1(1272.3,1228.78) ; CON8.10 v1(1048.57,1569.78)
MAC_MDIO: CON8.9 R9.2 R41.1 | length 1448
  Top w5: v1(432.8,701.28) R9.2 454.8,684.28 462.8,676.28 506.3,676.28 512.8,669.78 R41.1
  Bottom w5: v1(432.8,701.28) 440.3,708.78 440.3,1130.78 536.8,1227.28 1071.3,1227.28 1110.3,1266.28 1110.3,1320.28 1100.3,1330.28 1064.3,1330.28 1048.57,1346.02 CON8.9
MAC_RST: C8.2 CON8.29 R30.1 R43.1 | length 2166.5
  Top w5: v1(742.8,1434.78) 742.8,1420.28 755.8,1407.28 845.3,1407.28 851.8,1413.78 v1(851.8,1441.78) ; R43.1 996.3,709.78 1002.3,703.78 1002.3,658.78 1009.3,651.78 C8.2 v1(1052.8,651.78) R30.1
  Bottom w5: v1(742.8,1434.78) 730.8,1434.78 710.3,1414.28 710.3,1371.78 690.3,1351.78 690.3,1298.78 668.8,1277.28 501.8,1277.28 319.8,1095.28 319.8,671.28 330.3,660.78 712.8,660.78 733.8,681.78 1022.8,681.78 v1(1052.8,651.78) ; CON8.29 851.8,1387.92 v1(851.8,1441.78)
MAC_RXCLK: CON8.21 R5.2 | length 409.7
  Top w5: R5.2 698.8,1356.28 709.8,1367.28 908.3,1367.28 930.3,1389.28 v1(930.3,1441.78)
  Bottom w5: v1(930.3,1441.78) 930.3,1387.92 CON8.21
MAC_RXD0: CON8.26 R25.2 | length 739.5
  Top w5: R25.2 454.8,1268.28 533.8,1347.28 594.8,1347.28 832.3,1584.78 v1(890.8,1584.78)
  Bottom w5: v1(890.8,1584.78) 890.8,1529.65 CON8.26
MAC_RXD1: CON8.25 R26.2 | length 544.1
  Top w5: R26.2 560.3,1271.28 560.3,1318.78 568.8,1327.28 613.8,1327.28 673.8,1387.28 876.8,1387.28 890.8,1401.28 v1(890.8,1441.78)
  Bottom w5: v1(890.8,1441.78) 891.09,1441.5 CON8.25
MAC_RXD2: CON8.24 R3.2 | length 551.1
  Top w5: R3.2 533.8,1326.78 544.3,1337.28 600.8,1337.28 832.3,1568.78 v1(910.8,1568.78)
  Bottom w5: CON8.24@910.77,1528.28 CON8.24 ; CON8.24@910.8,1528.31 v1(910.8,1568.78)
MAC_RXD3: CON8.23 R4.2 | length 402.7
  Top w5: R4.2 648.8,1343.78 682.3,1377.28 895.3,1377.28 910.8,1392.78 v1(910.8,1427.78)
  Bottom w5: CON8.23 v1(910.8,1427.78)
MAC_RXDV: CON8.28 R24.2 | length 835.6
  Top w5: R24.2 435.8,1101.28 430.3,1106.78 430.3,1263.78 523.8,1357.28 589.3,1357.28 832.8,1600.78 v1(871.3,1600.78)
  Bottom w5: v1(871.3,1600.78) 871.4,1600.78 CON8.28
MAC_RXER: CON8.27 R23.2 R39.1 | length 1174.3
  Top w5: v1(398.8,851.28) R23.2 454.8,832.78 461.3,826.28 506.8,826.28 512.8,820.28 R39.1 ; v1(730.3,1404.28) 737.3,1397.28 862.4,1397.28 871.4,1406.28 v1(871.4,1427.78)
  Bottom w5: v1(398.8,851.28) 398.8,851.78 375.3,875.28 375.3,1132.78 509.8,1267.28 678.3,1267.28 700.3,1289.28 700.3,1343.78 730.3,1373.78 v1(730.3,1404.28) ; CON8.27 v1(871.4,1427.78)
MAC_TXCLK: CON8.20 R42.2 | length 248.9
  Top w5: R42.2 908.3,1349.28 950.3,1391.28 v1(950.3,1489.28)
  Bottom w5: CON8.20 950.14,1489.28 v1(950.3,1489.28)
MAC_TXD0: CON8.16 R16.2 | length 671.4
  Top w5: v1(989.51,1587.78) 989.51,1386.28 1021.01,1354.78 1144.8,1354.78 1226.8,1272.78 v1(1226.8,1235.78) ; R16.2 v1(1158.8,1235.78)
  Bottom w5: CON8.16 v1(989.51,1587.78) ; v1(1158.8,1235.78) v1(1226.8,1235.78)
MAC_TXD1: CON8.15 R15.2 | length 294.2
  Top w5: v1(1048.3,1277.78) 1048.3,1266.28 1054.3,1260.28 1099.8,1260.28 1105.8,1254.28 1105.8,1216.28 R15.2
  Bottom w5: CON8.15 989.51,1328.78 1040.51,1277.78 v1(1048.3,1277.78)
MAC_TXD2: CON8.18 R13.2 | length 729.3
  Top w5: v1(969.8,1569.78) 969.8,1388.28 1013.8,1344.28 1137.3,1344.28 1210.55,1271.03 1210.55,1142.03 v1(1216.8,1135.78) ; R13.2 v1(1158.8,1135.78)
  Bottom w5: CON8.18 v1(969.8,1569.78) ; v1(1158.8,1135.78) v1(1216.8,1135.78)
MAC_TXD3: CON8.17 R14.2 | length 516.1
  Top w5: v1(1075.3,1277.78) 1082.74,1277.78 1086.24,1274.28 1150.3,1274.28 1175.3,1249.28 1175.3,1096.28 1164.8,1085.78 R14.2
  Bottom w5: CON8.17 969.83,1326.28 1036.33,1259.78 1067.3,1259.78 1075.3,1267.78 v1(1075.3,1277.78)
MAC_TXEN: CON8.12 R18.2 | length 893.5
  Top w5: v1(1028.88,1587.78) 1028.88,1399.28 1053.38,1374.78 1159.8,1374.78 1255.3,1279.28 1255.3,1213.78 1245.3,1203.78 1245.3,1045.78 v1(1255.3,1035.78) ; R18.2 v1(1160.8,1035.78)
  Bottom w5: CON8.12 v1(1028.88,1587.78) ; v1(1160.8,1035.78) v1(1255.3,1035.78)
MAC_TXER: CON8.11 R33.1 | length 731.6
  Top w5: v1(1092.8,1312.78) 1106.8,1312.78 1117.3,1302.28 1161.8,1302.28 1200.3,1263.78 1200.3,864.78 1171.3,835.78 R33.1
  Bottom w5: CON8.11 1028.88,1330.28 1041.88,1317.28 1088.3,1317.28 v1(1092.8,1312.78)
RMII: R19.1 S1.1 S1.3 U14.4 | length 619.2
  Top w5: U14.4 1075.17,988.91 R19.1 1102.8,961.28 1167.8,961.28 v1(1168.8,960.28) ; S1.1 v1(1409.8,960.11) S1.3
  Bottom w5: v1(1168.8,960.28) 1409.63,960.28 v1(1409.8,960.11)
RX+: CON14.7 U6.11 | length 255.9
  Top w5: U6.11 836.3,121.28 855.3,102.28 920.8,102.28 944.3,78.78 v1(944.3,51.78)
  Bottom w5: v1(944.3,51.78) CON14.7
RX+_NL: U6.6 U14.27 | length 493.3
  Top w5: U14.27 752.18,906.28 748.8,902.91 748.8,561.78 763.3,547.28 830.3,547.28 836.3,541.28 U6.6
RX-: CON14.9 U6.9 | length 299.9
  Top w5: U6.9 736.3,132.28 748.8,119.78 820.3,119.78 849.8,90.28 916.3,90.28 924.8,81.78 v1(924.8,67.78)
  Bottom w5: CON14.9 924.8,107.42 v1(924.8,67.78)
RX-_NL: U6.8 U14.26 | length 416.5
  Top w5: U6.8 736.43,503.74 U14.26
TX+: CON14.1 U6.16 | length 212.4
  Top w5: v1(1003.38,67.78) 1003.38,111.37 1014.3,122.28 1077.8,122.28 1086.3,130.78 U6.16
  Bottom w5: v1(1003.38,67.78) CON14.1
TX+_NL: U6.1 U14.30 | length 653.9
  Top w5: U14.30 799.42,904.28 795.8,900.66 795.8,633.78 867.3,562.28 979.8,562.28 994.8,547.28 1079.8,547.28 1086.3,540.78 U6.1
TX-: CON14.3 U6.14 | length 173.9
  Top w5: v1(983.8,51.78) 983.8,73.78 986.3,76.28 U6.14
  Bottom w5: CON14.3 983.8,107.42 v1(983.8,51.78)
TX-_NL: U6.3 U14.29 | length 568.3
  Top w5: U14.29 783.67,626.41 859.8,550.28 975.8,550.28 986.3,539.78 U6.3
WIFI_3V3: C35.2 C38.2 CON8.37 CON8.38 CON8.39 CON8.40 | length 397.3
  Bottom w10: CON8.39 763.8,1387.92 ; CON8.40 763.8,1529.65 ; CON8.37 763.8,1387.92 ; CON8.38 763.8,1529.65 ; 763.8,1387.92 763.8,1529.65
  Bottom w15: C35.2 621.8,1583.28 621.8,1553.78 ; C38.2 621.8,1553.78 ; 763.8,1529.65 739.67,1553.78 621.8,1553.78
XI_NL: C6.2 R22.1 R29.1 X1.1 | length 918.5
  Top w5: R22.1 1032.8,1264.78 1032.8,1287.78 1040.3,1295.28 1103.3,1295.28 1108.3,1290.28 1154.8,1290.28 1187.8,1257.28 1187.8,907.78 1165.8,885.78 R29.1 v1(1115.8,885.78)
  Bottom w5: C6.2 1081.8,769.28 1115.8,803.28 v1(1115.8,885.78)
  Bottom w6: X1.1 1027.23,769.35 C6.2
XO_NL: C5.2 R31.1 X1.3 | length 104.7
  Bottom w6: X1.3 861.8,840.45 C5.2 R31.1
pads on no net: CON8.33 CON8.34 CON8.41 CON8.42 CON8.43 CON8.44 CON14.2 CON14.4 CON14.6 CON14.8 CON14.10 CON14.12 CON14.14 CON14.15 CON14.16 CON14.17 CON14.18 CON14.19 CON14.20 CON14.41 CON14.42 CON14.43 CON14.44 J1.1 J2.1 J5.1 J6.1 TP2.1 TP3.1 TP4.1 TP5.1 U6.4 U6.5 U6.12 U6.13 U14.24

## Polygon pours and split planes (outlines as drawn)
GND_EARTH on Top (solid, remove dead copper, pour order 1): 502.8,299.78 1222.8,299.78 1222.8,9.78 502.8,9.78
GND on Top (solid, remove dead copper, pour order 0): 212.8,1654.78 1512.8,1654.78 1512.8,9.78 1302.8,9.78 1302.8,379.78 422.8,379.78 422.8,9.78 212.8,9.78
GND on Bottom (solid, remove dead copper, pour order 3): 212.8,1654.78 1512.8,1654.78 1512.8,9.78 1302.8,9.78 1302.8,379.78 422.8,379.78 422.8,9.78 212.8,9.78
GND_EARTH on Bottom (solid, remove dead copper, pour order 2): 502.8,299.78 1222.8,299.78 1222.8,9.78 502.8,9.78

## Keep-outs
Top:
  region: 720.3,536.78 1103.3,536.78 1103.3,468.78 720.3,468.78 720.3,536.78
  region: 714.3,934.78 836.8,934.78 836.8,905.28 714.3,905.28 714.3,934.78
  region: 837.8,1058.28 867.3,1058.28 867.3,936.28 837.8,936.28 837.8,1058.28
  region: 684.3,1057.78 713.8,1057.78 713.8,935.28 684.3,935.28 684.3,1057.78
  region: 715.3,1088.28 836.3,1088.28 836.3,1059.28 715.3,1059.28 715.3,1088.28
  region: 719.8,202.78 1102.8,202.78 1102.8,133.28 719.8,133.28 719.8,202.78
Bottom:
  region: 744.3,1418.28 1137.8,1418.28 1137.8,1356.28 744.3,1356.28 744.3,1418.28
  region: 745.3,1565.28 1139.8,1565.28 1139.8,1497.28 745.3,1497.28 745.3,1565.28
  region: 815.8,284.28 1013.8,284.28 1013.8,213.28 815.8,213.28 815.8,284.28
  region: 815.3,139.78 1012.8,139.78 1012.8,73.78 815.3,73.78 815.3,139.78

## Other copper
Top:
  region net 3V3: 1301.8,1216.28 1325.3,1216.28 1325.3,1144.28 1301.8,1144.28 1301.8,1216.28
  region net $$$22214: 729.8,1244.28 779.3,1244.28 779.3,1227.28 815.8,1227.28 815.8,1269.78 769.8,1269.78 769.8,1288.28 729.8,1288.28 729.8,1244.28
Bottom:
  region net 3V3: 1102.8,1409.78 1237.8,1409.78 1237.8,1437.28 1347.8,1437.28 1347.8,1365.78 1102.8,1365.78 1102.8,1409.78
  region net 3V3: 1302.3,1216.28 1325.3,1216.28 1325.3,1141.28 1302.3,1141.28 1302.3,1216.28
  region net 3V3: 1102.3,1555.78 1131.8,1555.78 1131.8,1362.28 1102.3,1362.28 1102.3,1555.78
Multi-Layer:
  lines w5: 202.8,-0.22 202.8,3329.78 ; 202.8,-0.22 2.8,-0.22 2.8,3329.78 202.8,3329.78 ; 202.8,-0.22 202.8,1664.78 ; 202.8,-0.22 1521.8,-0.22 ; 202.8,1664.78 202.8,3329.78 ; 202.8,1664.78 1521.8,1664.78 ; 202.8,1664.78 1521.8,1664.78 ; 202.8,3329.78 1521.8,3329.78 ; 1521.8,-0.22 1521.8,1664.78 ; 1521.8,-0.22 2840.8,-0.22 ; 1521.8,-0.22 1521.8,1664.78 ; 1521.8,1664.78 1521.8,3329.78 ; 1521.8,1664.78 2840.8,1664.78 ; 1521.8,1664.78 1521.8,3329.78 ; 1521.8,1664.78 2840.8,1664.78 ; 1521.8,3329.78 2840.8,3329.78 ; 2840.8,-0.22 2840.8,1664.78 ; 2840.8,-0.22 2840.8,3329.78 ; 2840.8,-0.22 3040.8,-0.22 3040.8,3329.78 2840.8,3329.78 ; 2840.8,1664.78 2840.8,3329.78
  text "_ _ _ V_CUT" at 212.3,-4.72 h40 r270
  text "_ _ _ V_CUT" at 1531.8,-4.72 h40 r270
  text "_ _ _ V_CUT" at 2851.3,-8.22 h40 r270

## Silkscreen, mask and mechanical layers (free items; w line width, h text height)
Silkscreen Top:
  text "C500_PHY_IP101GRI_V1.0.0" at 851.8,1585.78 h25
  text "P/N:PBC500120XX" at 854.3,1517.78 h25
  text "AnyCloud" at 256.3,1466.78 h35
  text "2019/5/28" at 857.8,1449.28 h25
  text "RMII" at 1403.8,1310.28 h25 r90
  text "MII" at 1449.3,1310.28 h25 r90